# Altium PCB Chip_Socket_Programmer-X01.PcbDoc
Units mil, origin at the board's own origin, x right, y up, seen from the top; angles counter-clockwise.
Board outline 3000 x 2000 mil, 2 copper layers (Top Layer, Bottom Layer); 34 components, 20 nets, 125 pads, 53 vias.
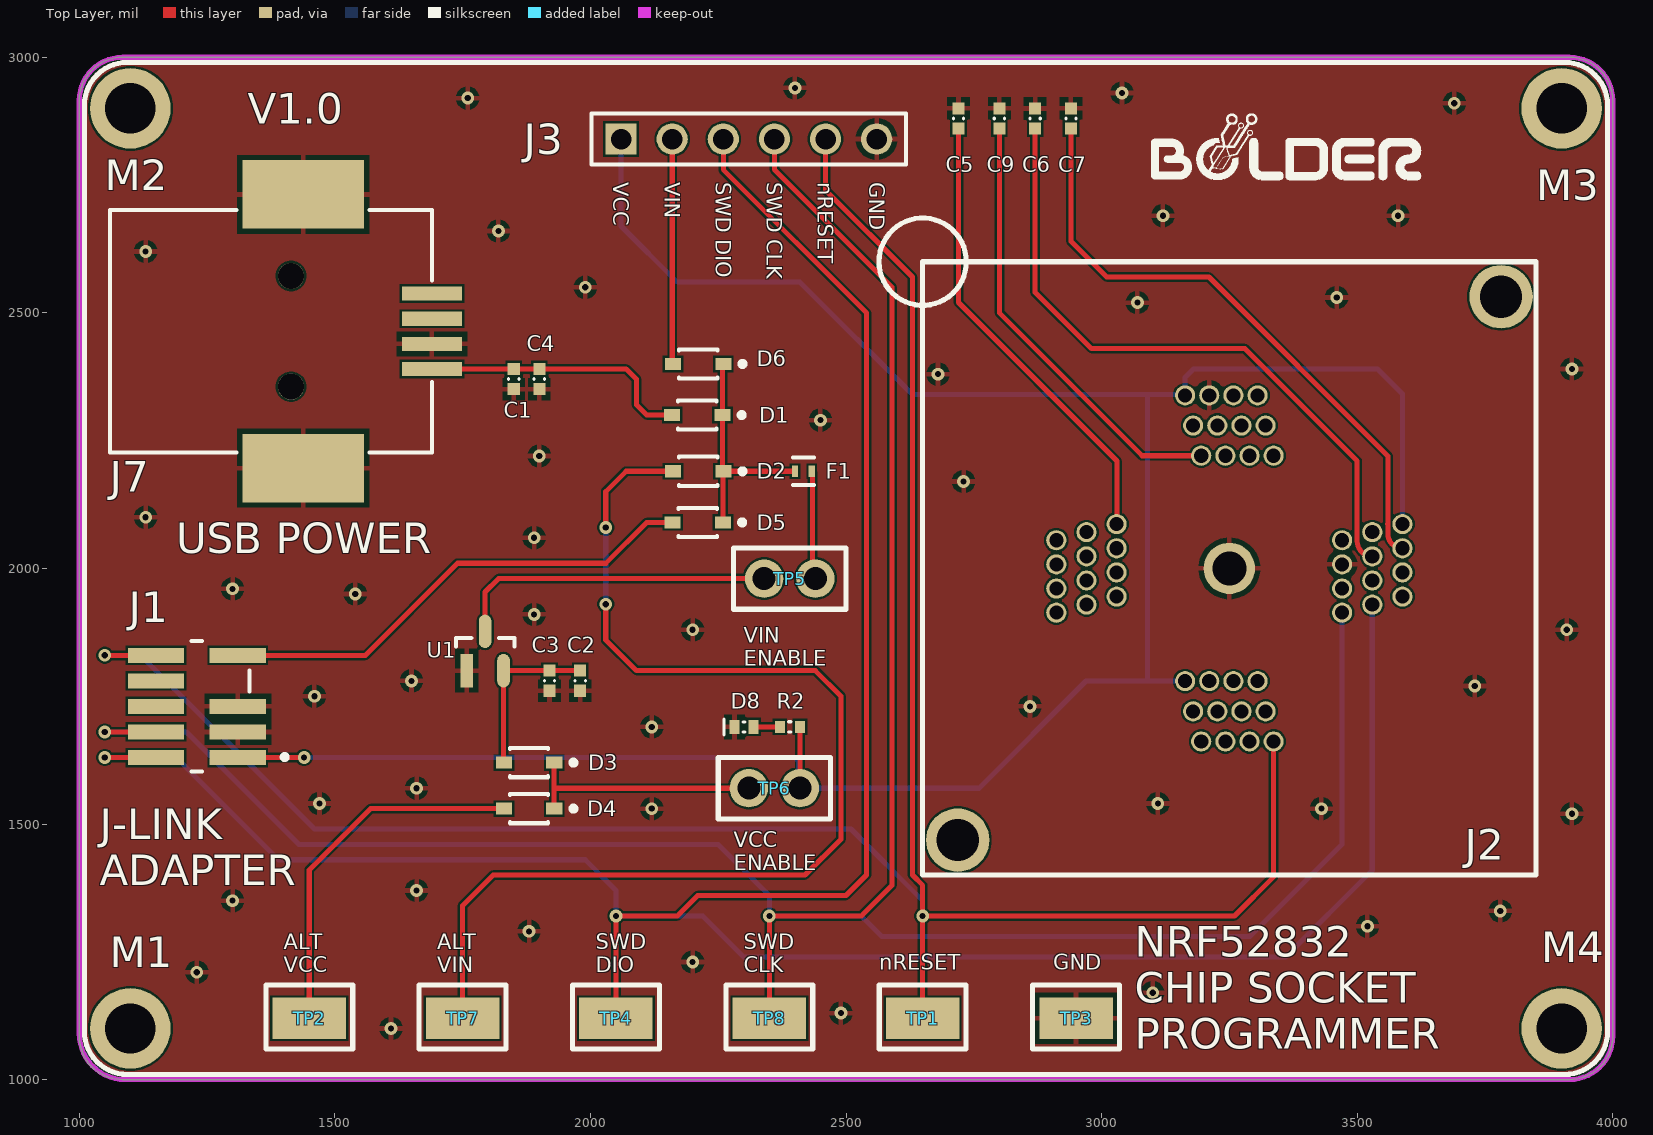
[diagram p0: Top Layer view]
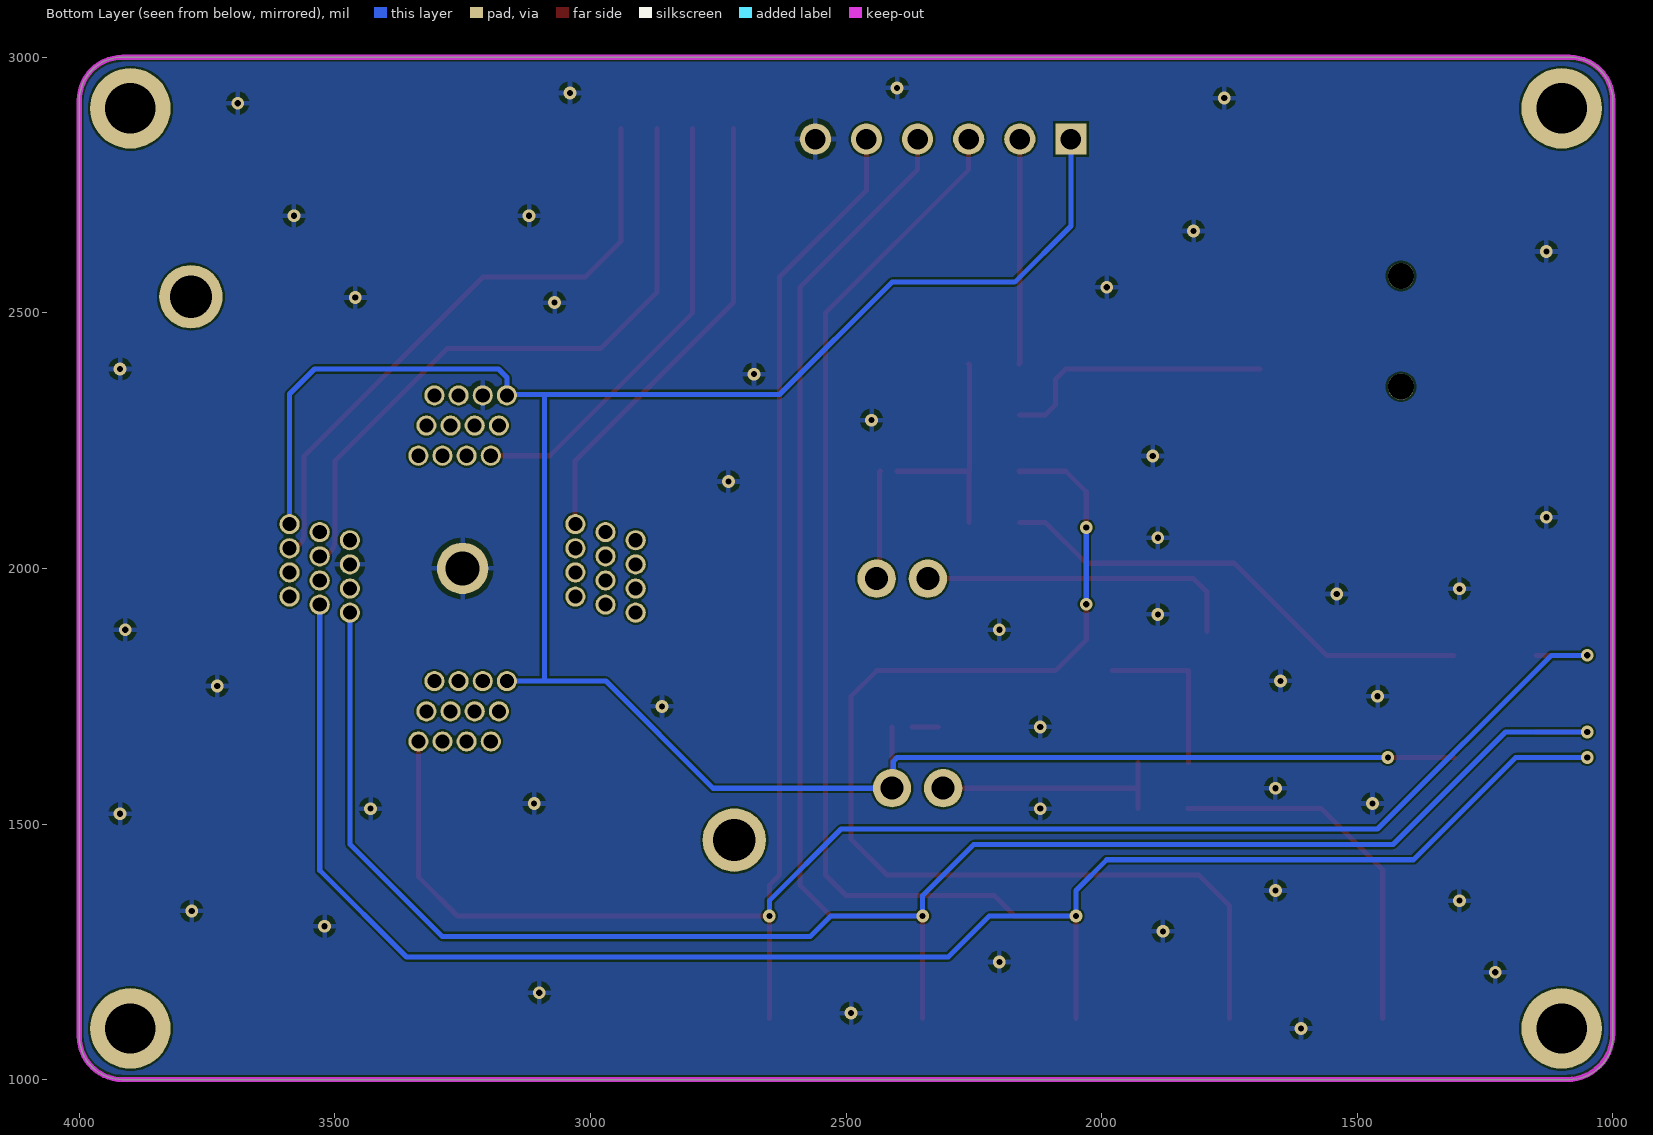
[diagram p1: Bottom Layer view, seen from below]
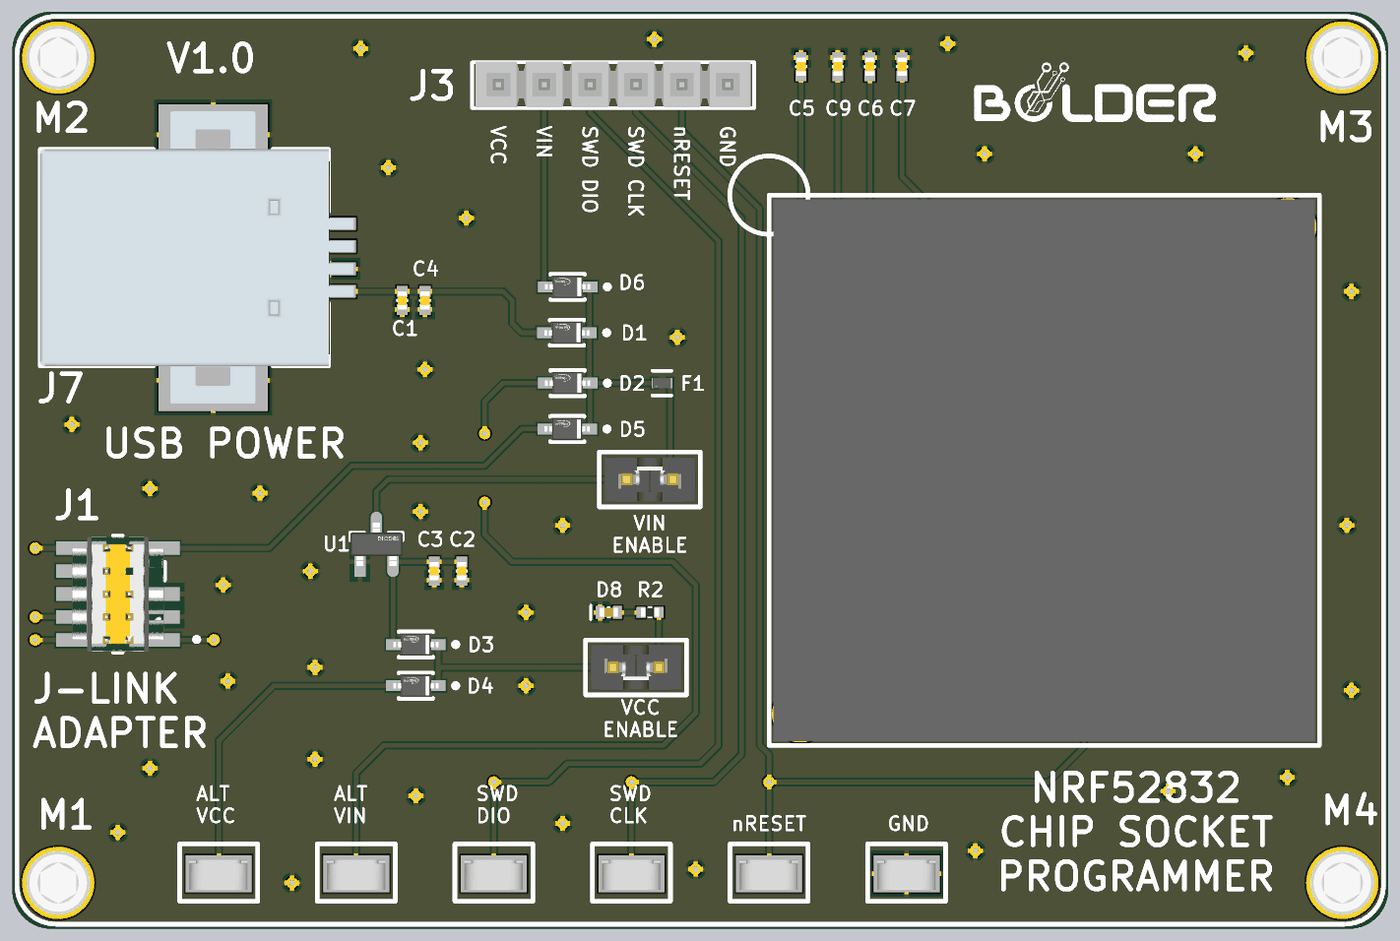
[diagram p2: 3D render of the assembled board from above, using the file's embedded part models]

## Layer stack, top to bottom
Top Solder: solder mask 0.4, Solder Resist, Dk 3.5
Top Layer: signal copper 1.4
Dielectric 1: dielectric 12.6, FR-4, Dk 4.8
Bottom Layer: signal copper 1.4
Bottom Solder: solder mask 0.4, Solder Resist, Dk 3.5

## Board outline
1000,1084.64 1000,2915.36 cw(c1084.64,2915.36) 1084.64,3000 3915.36,3000 cw(c3915.36,2915.36) 4000,2915.36 4000,1084.64 cw(c3915.36,1084.64) 3915.36,1000 1084.64,1000 cw(c1084.64,1084.64)

## Design rules (kind name [scope] priority, off if disabled: settings)
Clearance [All] p1: gap=4 ignorepadtopadclearanceinfootprint=FALSE
PolygonConnect [All] p1: connectstyle=Relief reliefconductorwidth=10 reliefentries=4 polygonreliefangle="90 Angle" airgapwidth=10
RoutingVias [All] p1: holewidth=28 width=50 viastyle="Through Hole" minholewidth=10 minwidth=25 maxholewidth=28 maxwidth=50
SolderMaskExpansion [All] p1: expansion=4 istentingtop=FALSE
Width [All] p1: maxlimit=40 minlimit=6 preferedwidth=10
30 further rules are at their usual default settings.

## Components (designator, comment, footprint, x,y, rotation, side; value= is the part's Value field where it differs from the comment)
C1 "1uF" C0402 1850,2370.32 r270 top
C2 "1uF" C0402 1980,1780.32 r270 top
C3 "10uF" C0402 1920,1780.32 r270 top
C4 "10uF" C0402 1900,2370.32 r270 top
C5 "100nF" C0402 2720,2880.32 r90 top
C6 "100pF" C0402 2870,2880 r90 top
C7 "100pF" C0402 2940,2880.32 r90 top
C9 "1uF" C0402 2800,2880.32 r270 top
D1 "BAS140WE6327HTSA1" FP-PG-SOD323-2-MFG 2209.21,2300 r180 top
D2 "BAS140WE6327HTSA1" FP-PG-SOD323-2-MFG 2210.79,2190 r180 top
D3 "BAS140WE6327HTSA1" FP-PG-SOD323-2-MFG 1880,1620 r180 top
D4 "BAS140WE6327HTSA1" FP-PG-SOD323-2-MFG 1880,1530 r180 top
D5 "BAS140WE6327HTSA1" FP-PG-SOD323-2-MFG 2210,2090 r180 top
D6 "BAS140WE6327HTSA1" FP-PG-SOD323-2-MFG 2210.79,2400 r180 top
D8 "Red" LED_0402 2300.63,1690 r180 top
F1 "F0402G0R05FNTR" FP-F0402G-MFG 2416.54,2190 r180 top value=3.4Ω
J1 "FTSH-105-01-L-DV-007-K" FTSH-105-01-L-DV-007-K 1310.24,1630 r0 top
J2 "248-4205-01" 248-4205-01 3250,2000 r0 top locked
J3 "TSW-106-07-T-S" SMTC-TSW-106-07-X-S 2060,2840 r0 top
J7 "62910416121" 62910416121 1375.04,2463.82 r270 top
M1 "M2/2-56 Mounting Hole" "MOUNTING HOLE" 1100,1100 r0 top
M2 "M2/2-56 Mounting Hole" "MOUNTING HOLE" 1100,2900 r0 top
M3 "M2/2-56 Mounting Hole" "MOUNTING HOLE" 3900,2900 r0 top
M4 "M2/2-56 Mounting Hole" "MOUNTING HOLE" 3900,1100 r0 top
R2 "422R" R0402 2390.32,1690 r180 top
TP1 "S1751-46R" S1751-46R 2650,1120 r0 top
TP2 "S1751-46R" S1751-46R 1450,1120 r0 top
TP3 "S1751-46R" S1751-46R 2950,1120 r0 top
TP4 "S1751-46R" S1751-46R 2050,1120 r0 top
TP5 "JUMPER" JUMPER 2340,1980 r0 top
TP6 "JUMPER" JUMPER 2410,1570 r180 top
TP7 "S1751-46R" S1751-46R 1750,1120 r0 top
TP8 "S1751-46R" S1751-46R 2350,1120 r0 top
U1 "AP7313-33SRG-7" FP-SOT23-IPC_A 1793.98,1838.45 r90 top

## Footprints (in the part's own frame and the unit in brackets; to place one, negate y for a bottom-side part, rotate by r counter-clockwise, add the part's x,y. Pads: shape width x height; smd on the part's side, far side on the other; paste and mask are expansions set on the pad)
248-4205-01 [mm] "3M Chip Socket, 48 Position QFN, 6x6 package, 0.4 mm Pitch"
  round 1 hole 0.7: 1(-5.6,2.2) 2(-7.1,1.8) 3(-8.6,1.4) 4(-5.6,1) 5(-7.1,0.6) 6(-8.6,0.2) 7(-5.6,-0.2) 8(-7.1,-0.6) 9(-8.6,-1) 10(-5.6,-1.4) 11(-7.1,-1.8) 12(-8.6,-2.2) 13(-2.2,-5.6) 14(-1.8,-7.1) 15(-1.4,-8.6) 16(-1,-5.6) 17(-0.6,-7.1) 18(-0.2,-8.6) 19(0.2,-5.6) 20(0.6,-7.1) 21(1,-8.6) 22(1.4,-5.6) 23(1.8,-7.1) 24(2.2,-8.6) 25(5.6,-2.2) 26(7.1,-1.8) 27(8.6,-1.4) 28(5.6,-1) 29(7.1,-0.6) 30(8.6,-0.2) 31(5.6,0.2) 32(7.1,0.6) 33(8.6,1) 34(5.6,1.4) 35(7.1,1.8) 36(8.6,2.2) 37(2.2,5.6) 38(1.8,7.1) 39(1.4,8.6) 40(1,5.6) 41(0.6,7.1) 42(0.2,8.6) 43(-0.2,5.6) 44(-0.6,7.1) 45(-1,8.6) 46(-1.4,5.6) 47(-1.8,7.1) 48(-2.2,8.6)
  round 2.55 hole 1.7: 49(0,0)
  round 3.15 hole 2.1: MH1(-13.5,-13.5) MH2(13.5,13.5)
  silkscreen extent -15.24,-15.24 15.24,15.24, body extent -15,-15 15,15, height 17.1
62910416121 [mm] "USB 2.0 Type B SMT Horizontal"
  rect 0.7x3 smd: 1(1.875,8) 2(-0.625,8) 3(-1.875,8) 4(0.625,8)
  round 1.3 hole 1.3 unplated: MH1(-2.75,1) MH2(2.75,1)
  rect 3.4x6.04 smd: Shell(-6.8,1.6) Shell(6.8,1.6)
  silkscreen extent -6.02,-8 6.02,8, body extent -8.1,-8 8.1,9.39, height 11.16
C0402 [mm]
  rect 0.6x0.6 smd: 1(-0.5,0) 2(0.5,0)
  silkscreen extent -0.02,-0.25 0.02,0.25, body extent -0.5,-0.25 0.5,0.25, height 0.55
FP-F0402G-MFG [mm]
  rect 0.31x0.55 smd paste+0 mask+0: 1(-0.42,0) 2(0.42,0)
  silkscreen extent -0.53,-0.68 0.53,0.68, body extent -0.67,-0.41 0.67,0.41, height 0.25
FP-PG-SOD323-2-MFG [mm]
  rect 0.8x0.6 smd paste+0 mask+0: 1(-1.25,0) 2(1.25,0)
  silkscreen extent -2.33,-0.72 0.95,0.72, body extent -1.75,-0.82 1.75,0.82, height 0.25
FP-SOT23-IPC_A [mm]
  rect 1.659x0.627 smd paste+0 mask+0: 1(-0.977,0.915)
  rrect100% 1.659x0.627 smd paste+0 mask+0: 2(-0.977,-0.915) 3(0.977,0)
  silkscreen extent 0.23,-1.45 0.65,1.45, body extent -2.31,-1.95 2.31,1.95, height 0.25
FTSH-105-01-L-DV-007-K [mm]
  rect 2.79x0.74 smd paste+0 mask+0: 1(0,0) 2(-4.07,0) 3(0,1.27) 4(-4.07,1.27) 5(0,2.54) 6(-4.07,2.54) 8(-4.07,3.81) 9(0,5.08) 10(-4.07,5.08)
  silkscreen extent -2.3,-0.7 2.46,5.78, body extent -5.57,-0.8 1.5,5.88, height 0.25
JUMPER [mil]
  round 75 hole 45: 1(0,0) 2(100,0)
  silkscreen extent -60,-60 160,60, body extent -50,-50 150,50, height 343
LED_0402 [mm] "0402 w/ LED mark"
  rect 0.5x0.7 smd: A(-0.475,0) K(0.475,0)
  silkscreen extent -0.04,-0.4 1,0.4, body extent -0.5,-0.25 0.5,0.25, height 0.35
"MOUNTING HOLE" [mm] "M2 or 2-56 Mounting Hole"
  round 4 hole 2.5: 11(0,0)
  body extent -1.78,-1.83 1.78,1.83, height 2.28
R0402 [mm]
  rect 0.5x0.6 smd: 1(-0.5,0) 2(0.5,0)
  silkscreen extent -0.06,-0.25 0.06,0.25, body extent -0.5,-0.25 0.5,0.25, height 0.35
S1751-46R [mm] "PC TEST POINT TIN SMD"
  rect 3.65x2.05 smd: 1(0,0)
  silkscreen extent -2.16,-1.52 2.16,1.65, body extent -1.63,-0.89 1.62,0.76, height 2
SMTC-TSW-106-07-X-S [mm] ".025 SQ Post Terminal Strip Assembly, 1x6 Pins, Vertical, 2.54mm Pitch, Male"
  rect 1.55x1.55 hole 1.02: 1(0,0)
  round 1.55 hole 1.02: 2(2.54,0) 3(5.08,0) 4(7.62,0) 5(10.16,0) 6(12.7,0)
  silkscreen extent -1.46,-1.27 14.16,1.27, body extent -1.27,-1.24 13.97,1.3, height 8.38

## Part data
C1 C2 C9: library part C-0402(1005), "Ceramic Capacitor, Multilayer, Ceramic, 6.3V, 20% +Tol, 20% -Tol, X5R, 15% TC, 1uF, Surface Mount, 0402", Case Code (Imperial)=0402, Case Code (Metric)=1005, Dielectric=X5R, Manufacturer=Yageo, Manufacturer Part Number=CC0402MRX5R5BB105, Max Operating Temperature=85°C, Min Operating Temperature=-55°C, Package Quantity=1, Supplier Part Number 1=311-1441-1-ND, Tolerance=20%, Voltage Rating=6.3V, Capacitance=1uF, Case/Package=0402, Category="Ceramic Capacitors", ComponentLink1Description=https://datasheet.ciiva.com/169/product-169683.pdf, ComponentLink1URL=https://datasheet.ciiva.com/169/product-169683.pdf, ComponentLink2Description=https://datasheet.ciiva.com:443/pdfs/VipMasterIC/IC/YAGO/YAGO-S-A0006851646/YAGO-S-A0006851646-1.pdf?src-supplier=IHS+Markit, ComponentLink2URL=https://datasheet.ciiva.com:443/pdfs/VipMasterIC/IC/YAGO/YAGO-S-A0006851646/YAGO-S-A0006851646-1.pdf?src-supplier=IHS+Markit, ComponentLink3Description=https://datasheet.ciiva.com/176/mlccorderingcode-176806.pdf?src-supplier=Digi-Key, ComponentLink3URL=https://datasheet.ciiva.com/176/mlccorderingcode-176806.pdf?src-supplier=Digi-Key, ComponentLink4Description=https://datasheet.ciiva.com/176/mlccorderingcode-176807.pdf?src-supplier=Digi-Key, ComponentLink4URL=https://datasheet.ciiva.com/176/mlccorderingcode-176807.pdf?src-supplier=Digi-Key, ComponentLink5Description=https://datasheet.ciiva.com/176/mlccorderingcode-176808.pdf?src-supplier=Digi-Key, ComponentLink5URL=https://datasheet.ciiva.com/176/mlccorderingcode-176808.pdf?src-supplier=Digi-Key, Composition=Ceramic, Depth=0.5mm, Dissipation Factor=10%, Halogen Free="Halogen Free", Height=0.5mm, Lead Free="Lead Free", Length=1mm, Mount="Surface Mount", Number of Pins=2, Packaging="Tape and Reel", Pricing 1="1=0.13000, 10=0.08900, 100=0.04200, 500=0.02946, 1000=0.02439, 2500=0.02270, 5000=0.02076 (USD)", RoHS=Yes, Stock 1=16697, Supplier 1=Digi-Key, Termination=SMD/SMT, Thickness=0.022inch, Voltage Rating (DC)=6.3V, Width=0.5mm
C3 C4: library part C-0402(1005), "Ceramic Capacitor, Multilayer, Ceramic, 10V, 20% +Tol, 20% -Tol, X5R, 15% TC, 10uF, Surface Mount, 0402", Capacitor Type=Ceramic, Manufacturer="Kyocera AVX", Manufacturer Part Number=0402ZD106MAT2A, Max Operating Temperature=85°C, Min Operating Temperature=-55°C, Negative Tolerance=20%, Package Shape=Rectangular, Rated DC Voltage (URdc)=10V, Supplier Part Number 1=478-10052-1-ND, Temperature Characteristics Code=X5R, Capacitance=10uF, Category="Ceramic Capacitors", ComponentLink1Description=https://datasheet.ciiva.com:443/pdfs/VipMasterIC/IC/AVXC/AVXC-S-A0009640604/AVXC-S-A0009640604-1.pdf?src-supplier=IHS+Markit, ComponentLink1URL=https://datasheet.ciiva.com:443/pdfs/VipMasterIC/IC/AVXC/AVXC-S-A0009640604/AVXC-S-A0009640604-1.pdf?src-supplier=IHS+Markit, ComponentLink2Description=http://catalogs.avx.com/SurfaceMount.pdf?src-supplier=Digi-Key, ComponentLink2URL=http://catalogs.avx.com/SurfaceMount.pdf?src-supplier=Digi-Key, ComponentLink3Description=http://datasheets.avx.com/cx5r.pdf?src-supplier=Digi-Key, ComponentLink3URL=http://datasheets.avx.com/cx5r.pdf?src-supplier=Digi-Key, ComponentLink4Description=https://www.farnell.com/datasheets/2260752.pdf?src-supplier=Newark, ComponentLink4URL=https://www.farnell.com/datasheets/2260752.pdf?src-supplier=Newark, Dielectric Material=Ceramic, JESD-609 Code=e3, Mount="Surface Mount", Multilayer=Yes, Number of Pins=2, Packaging="Tape and Reel", Positive Tolerance=20%, Pricing 1="1=0.54000, 10=0.37400, 50=0.26160, 100=0.22420, 500=0.16818, 1000=0.14202, 2500=0.13455, 5000=0.12708 (USD)", REACH SVHC=Yes, RoHS=Yes, RoHS Compliant=Yes, Size Code=0402, Stock 1=113474, Supplier 1=Digi-Key, Terminal Finish=Nickel, Termination=Wraparound
C5: library part C-0402(1005), "Ceramic Capacitor, Multilayer, Ceramic, 25V, 10% +Tol, 10% -Tol, X5R, 15% TC, 0.1uF, Surface Mount, 0402", Case Code (Imperial)=0402, Case Code (Metric)=1005, Dielectric=X5R, Manufacturer="Taiyo Yuden", Manufacturer Part Number=TMK105BJ104KV-F, Max Operating Temperature=85°C, Min Operating Temperature=-55°C, Package Quantity=1, Supplier Part Number 1=587-1456-1-ND, Tolerance=10%, Voltage=25V, Capacitance=100nF, Case/Package=0402, Category="Ceramic Capacitors", ComponentLink1Description=https://datasheet.ciiva.com/169/product-169683.pdf, ComponentLink1URL=https://datasheet.ciiva.com/169/product-169683.pdf, ComponentLink2Description=https://datasheet.ciiva.com:443/pdfs/VipMasterIC/IC/TAIY/TAIY-S-A0009103435/TAIY-S-A0009103038-1.pdf?src-supplier=IHS+Markit, ComponentLink2URL=https://datasheet.ciiva.com:443/pdfs/VipMasterIC/IC/TAIY/TAIY-S-A0009103435/TAIY-S-A0009103038-1.pdf?src-supplier=IHS+Markit, ComponentLink3Description=https://datasheet.ciiva.com/30051/25tmk105bj104kv-f-30051094.pdf?src-supplier=Onlinecomponents.com, ComponentLink3URL=https://datasheet.ciiva.com/30051/25tmk105bj104kv-f-30051094.pdf?src-supplier=Onlinecomponents.com, ComponentLink4Description=https://datasheet.ciiva.com/15922/28tmk105bj104kv-f-15922315.pdf?src-supplier=Onlinecomponents.com, ComponentLink4URL=https://datasheet.ciiva.com/15922/28tmk105bj104kv-f-15922315.pdf?src-supplier=Onlinecomponents.com, ComponentLink5Description=https://datasheet.ciiva.com/131/tmk105bj104kv-f-ss-131420.pdf?src-supplier=Digi-Key, ComponentLink5URL=https://datasheet.ciiva.com/131/tmk105bj104kv-f-ss-131420.pdf?src-supplier=Digi-Key, ComponentLink6Description=https://datasheet.ciiva.com/22768/1693457-22768649.pdf?src-supplier=Farnell, ComponentLink6URL=https://datasheet.ciiva.com/22768/1693457-22768649.pdf?src-supplier=Farnell, Composition=Ceramic, Depth=0.5mm, Halogen Free="Halogen Free", Height=0.5mm, Lead Free="Lead Free", Length=1mm, Mount="Surface Mount", Number of Pins=2, Packaging="Tape and Reel", Pricing 1="1=0.10000, 10=0.04600, 100=0.02050, 500=0.01464, 1000=0.01150, 2500=0.01045, 5000=0.00961 (USD)", REACH SVHC="No SVHC", RoHS=Yes, Stock 1=27456801, Supplier 1=Digi-Key, Termination=SMD/SMT, Thickness=0.022inch, Voltage Rating=25V, Voltage Rating (DC)=25V, Weight=2.3E-05oz, Width=0.5mm
C6 C7: library part C-0402(1005), "Ceramic Capacitor, Multilayer, Ceramic, 50V, 1% +Tol, 1% -Tol, C0G, 30ppm/Cel TC, 0.0001uF, Surface Mount, 0402", Case Code (Imperial)=0402, Case Code (Metric)=1005, Dielectric=C0G, Manufacturer=Yageo, Manufacturer Part Number=CC0402FRNPO9BN101, Max Operating Temperature=125°C, Min Operating Temperature=-55°C, Package Quantity=10000, Supplier Part Number 1=311-3329-1-ND, Tolerance=1%, Voltage Rating=50V, Capacitance=100pF, Case/Package=0402, Category="Ceramic Capacitors", ComponentLink1Description=https://datasheet.ciiva.com/169/product-169683.pdf, ComponentLink1URL=https://datasheet.ciiva.com/169/product-169683.pdf, ComponentLink2Description=https://datasheet.ciiva.com:443/pdfs/VipMasterIC/IC/YAGO/YAGO-S-A0009251638/YAGO-S-A0009251638-1.pdf?src-supplier=IHS+Markit, ComponentLink2URL=https://datasheet.ciiva.com:443/pdfs/VipMasterIC/IC/YAGO/YAGO-S-A0009251638/YAGO-S-A0009251638-1.pdf?src-supplier=IHS+Markit, ComponentLink3Description=http://www.mouser.com/ds/2/447/Yageo_UPY-GP_NP0_16V-to-50V_9-358835.pdf?src-supplier=Mouser, ComponentLink3URL=http://www.mouser.com/ds/2/447/Yageo_UPY-GP_NP0_16V-to-50V_9-358835.pdf?src-supplier=Mouser, ComponentLink4Description=http://components.arrow.com/part/dataview/0323_00775990?src-supplier=Arrow+Europe, ComponentLink4URL=http://components.arrow.com/part/dataview/0323_00775990?src-supplier=Arrow+Europe, ComponentLink5Description=http://www.yageo.com/NewPortal/yageodocoutput?fileName=/pdf/MLCC/UPY-GP_NP0_16V-to-50V_14.pdf&src-supplier=Digi-Key, ComponentLink5URL=http://www.yageo.com/NewPortal/yageodocoutput?fileName=/pdf/MLCC/UPY-GP_NP0_16V-to-50V_14.pdf&src-supplier=Digi-Key, ComponentLink6Description=http://www.yageo.com/documents/recent/UPY-GP_NP0_16V-to-50V_16.pdf?src-supplier=Digi-Key, ComponentLink6URL=http://www.yageo.com/documents/recent/UPY-GP_NP0_16V-to-50V_16.pdf?src-supplier=Digi-Key, ComponentLink7Description=http://www.yageo.com/documents/recent/UPY-GP_NP0_16V-to-50V_9.pdf?src-supplier=Future+Electronics, ComponentLink7URL=http://www.yageo.com/documents/recent/UPY-GP_NP0_16V-to-50V_9.pdf?src-supplier=Future+Electronics, Composition=Ceramic, Depth=0.5mm, Lead Free="Lead Free", Length=1mm, Mount="Surface Mount", Packaging="Tape and Reel", Pricing 1="1=0.11000, 10=0.08200, 100=0.03840, 500=0.02690, 1000=0.02228, 2500=0.02073, 5000=0.01897 (USD)", RoHS=Yes, Stock 1=22812, Supplier 1=Digi-Key, Termination=SMD/SMT, Thickness=0.022inch, Voltage Rating (DC)=50V, Width=0.02inch
D1 D2 D3 D4 D5 D6: library part CMP-32890-000002-1, "DIODE SCHOTTKY 40V 120MA SOD323", Average Rectified Current=120mA, Case/Package=SOD-323-2, Forward Voltage=1V, Manufacturer=Infineon, Max Operating Temperature=125°C, Max Power Dissipation=250mW, Max Repetitive Reverse Voltage (Vrrm)=40V, Min Operating Temperature=-55°C, Package Body Material=Plastic, Package Shape=Rectangular, Package Style="SMALL OUTLINEMeter", Peak Non-Repetitive Surge Current=200mA, Supplier Part Number 1=BAS140WE6327HTSA1CT-ND, Category="Rectifier Diodes", ComponentLink1Description=https://datasheet.ciiva.com:443/pdfs/VipMasterIC/IC/INFN/INFNS11688/INFNS11688-1.pdf?src-supplier=IHS+Markit, ComponentLink1URL=https://datasheet.ciiva.com:443/pdfs/VipMasterIC/IC/INFN/INFNS11688/INFNS11688-1.pdf?src-supplier=IHS+Markit, ComponentLink2Description=https://datasheet.ciiva.com/26851/getdatasheetpartid-730941-26851022.pdf?src-supplier=Verical, ComponentLink2URL=https://datasheet.ciiva.com/26851/getdatasheetpartid-730941-26851022.pdf?src-supplier=Verical, ComponentLink3Description=https://datasheet.ciiva.com/8303/infineon-bas40-bas140series-ds-v01-01-en-8303321.pdf?src-supplier=Avnet, ComponentLink3URL=https://datasheet.ciiva.com/8303/infineon-bas40-bas140series-ds-v01-01-en-8303321.pdf?src-supplier=Avnet, Diode Element Material=SILICON, Diode Type=RECTIFIER, Element Configuration=Single, Forward Current=120mA, Halogen Free="Not Halogen Free", JESD-30 Code=R-PDSO-G2, JESD-609 Code=e3, Lead Free="Lead Free", Manufacturer Part Number=BAS140WE6327HTSA1, Max Output Current=120mA, Max Reverse Voltage (DC)=40V, Moisture Sensitivity Level=1, Mount="Surface Mount", Number of Elements=1, Number of Pins=2, Packaging="Tape and Reel", Pricing 1="1=0.55000, 10=0.41300, 100=0.25740, 500=0.17612, 1000=0.13547 (USD)", Qualification Status="Not Qualified", Radiation Hardening=No, REACH SVHC=Yes, Reverse Recovery Time=100ps, RoHS=Yes, RoHS Compliant=Yes, Stock 1=1828, Supplier 1=Digi-Key, Surface Mount=Yes, Technology=SCHOTTKY, Terminal Finish=Tin, Terminal Form="Gull Wing", Terminal Position=DUAL
D8: library part LED_0402(1005), "Single Color LED, Hyper Red, Water Clear, 0.8mm", Case Code (Imperial)=0402, Case Code (Metric)=1005, Forward Current=20mA, Forward Voltage=1.95V, Lens Color=Clear, Manufacturer=Kingbright, Manufacturer Part Number=APHHS1005SURCK, Max Operating Temperature=85°C, Min Operating Temperature=-40°C, Package Quantity=2000, Supplier Part Number 1=754-1104-1-ND, Case/Package=0402, Category=LEDs, Color=Red, ComponentLink1Description=https://datasheet.ciiva.com:443/pdfs/VipMasterIC/IC/KBEC/KBEC-S-A0008947180/KBEC-S-A0008958151-1.pdf?src-supplier=IHS+Markit, ComponentLink1URL=https://datasheet.ciiva.com:443/pdfs/VipMasterIC/IC/KBEC/KBEC-S-A0008947180/KBEC-S-A0008958151-1.pdf?src-supplier=IHS+Markit, ComponentLink2Description=https://datasheet.ciiva.com/4689/aphhs1005surck-32322-4689068.pdf?src-supplier=Mouser, ComponentLink2URL=https://datasheet.ciiva.com/4689/aphhs1005surck-32322-4689068.pdf?src-supplier=Mouser, ComponentLink3Description=https://datasheet.ciiva.com/2114/aphhs1005surck-2114140.pdf?src-supplier=Digi-Key, ComponentLink3URL=https://datasheet.ciiva.com/2114/aphhs1005surck-2114140.pdf?src-supplier=Digi-Key, ComponentLink4Description=https://datasheet.ciiva.com/14603/70062833-14603899.pdf?src-supplier=Allied+Electronics, ComponentLink4URL=https://datasheet.ciiva.com/14603/70062833-14603899.pdf?src-supplier=Allied+Electronics, ComponentLink5Description=https://datasheet.ciiva.com/2114/aphhs1005surck-2114142.pdf?src-supplier=Digi-Key, ComponentLink5URL=https://datasheet.ciiva.com/2114/aphhs1005surck-2114142.pdf?src-supplier=Digi-Key, ComponentLink6Description=https://datasheet.ciiva.com/2114/aphhs1005surck-2114141.pdf?src-supplier=Digi-Key, ComponentLink6URL=https://datasheet.ciiva.com/2114/aphhs1005surck-2114141.pdf?src-supplier=Digi-Key, Dominant Wavelength=630nm, Height=0.6mm, Illumination Color=Red, Lead Free="Lead Free", Length=1mm, Lens Style=Clear,Flat, Luminous Intensity=220mcd, Mount="Surface Mount", Number of LEDs=1, Number of Pins=2, Packaging="Tape and Reel", Pricing 1="1=0.50000, 10=0.35400, 100=0.20650, 500=0.14160, 1000=0.11800 (USD)", RoHS=Yes, Stock 1=12156, Supplier 1=Digi-Key, Test Current=20mA, Viewing Angle=120°, Wavelength=635nm, Width=0.5mm
F1: library part CMP-04585-000002-1, "FUSE BOARD MOUNT 50MA 32VDC 0402", Current Rating=50mA, Fuse Voltage Drop=250mV, Manufacturer="AVX Corporation", Max Operating Temperature=125°C, Min Operating Temperature=-55°C, Package=F0402G, Resistance=3.4Ω, Supplier Part Number 1=478-6482-1-ND, Temperature="-55°C to +125°C", Temperature Range High=+125°C, Voltage Rating=32V, Automotive=No, Category=Fuse, Circuit Protection Type="Electric Fuse", ComponentLink1Description=https://datasheet.ciiva.com:443/pdfs/VipMasterIC/IC/AVXC/AVXCS07889/AVXCS07889-1.pdf?src-supplier=IHS+Markit, ComponentLink1URL=https://datasheet.ciiva.com:443/pdfs/VipMasterIC/IC/AVXC/AVXCS07889/AVXCS07889-1.pdf?src-supplier=IHS+Markit, ComponentLink2Description=Datasheet, ComponentLink2URL=http://datasheets.avx.com/AccuGuardLC_0402.pdf, ComponentLink3Description=https://datasheet.ciiva.com/4485/accug2minilc-38833-4485751.pdf?src-supplier=Mouser, ComponentLink3URL=https://datasheet.ciiva.com/4485/accug2minilc-38833-4485751.pdf?src-supplier=Mouser, ComponentLink4Description=https://datasheet.ciiva.com/301/accug2minilc-301366.pdf?src-supplier=Digi-Key, ComponentLink4URL=https://datasheet.ciiva.com/301/accug2minilc-301366.pdf?src-supplier=Digi-Key, ComponentLink5Description=https://datasheet.ciiva.com/301/accug2minilc-301367.pdf?src-supplier=Digi-Key, ComponentLink5URL=https://datasheet.ciiva.com/301/accug2minilc-301367.pdf?src-supplier=Digi-Key, ComponentLink6Description=https://datasheet.ciiva.com/301/accug2minilc-301368.pdf?src-supplier=Digi-Key, ComponentLink6URL=https://datasheet.ciiva.com/301/accug2minilc-301368.pdf?src-supplier=Digi-Key, ComponentLink7Description=https://datasheet.ciiva.com/17417/accug2minilc-17417929.pdf?src-supplier=Avnet+Europe, ComponentLink7URL=https://datasheet.ciiva.com/17417/accug2minilc-17417929.pdf?src-supplier=Avnet+Europe, ComponentLink8Description=https://datasheet.ciiva.com/3017/accug2minilc-3017725.pdf?src-supplier=Avnet, ComponentLink8URL=https://datasheet.ciiva.com/3017/accug2minilc-3017725.pdf?src-supplier=Avnet, Device Class L1="Circuit Protection", Device Class L2=Fuses, Device Class L3=unset, Digikey Description="FUSE BOARD MOUNT 50MA 32VDC 0402", Fuse Blow Speed=Fast, Fuse Current=50mA, Height=0.4mm, JESD-609 Code=e3, Joule-integral-Nom=0J, Lead Free=Yes, Manufacturer Part Number=F0402G0R05FNTR, Mount="Surface Mount", Mouser Description="Surface Mount Fuses 0402 50mA fuse", Octopart=https://octopart.com/f0402g0r05fntr-avx-19631750, Pricing 1="1=0.80000, 5=0.78000, 10=0.75600, 50=0.63600, 100=0.52800, 250=0.48000, 500=0.40800, 1000=0.36000 (USD)", REACH SVHC=Yes, RoHS=TRUE, RoHS Compliant=Yes, Stock 1=222662, Supplier 1=Digi-Key, Temperature Range Low=-55°C, Terminal Finish=Nickel, Voltage Rating (AC)=32V, Voltage Rating (DC)=32V
J1: library part 7c368be3265735b2816d0cab4417f87, "CONN HEADER SMD 10POS 1.27MM", Current Rating=3.4A, Flammability Rating="UL94 V-0", Insulation Color=Black, Manufacturer=Samtec, Max Operating Temperature=125°C, Min Operating Temperature=-55°C, Supplier Part Number 1=SAM9438-ND, Category="Headers and Wire Housings", ComponentLink1Description=https://datasheet.ciiva.com:443/pdfs/VipMasterIC/IC/SAMI/SAMI-S-A0006911451/SAMI-S-A0006911451-1.pdf?src-supplier=IHS+Markit, ComponentLink1URL=https://datasheet.ciiva.com:443/pdfs/VipMasterIC/IC/SAMI/SAMI-S-A0006911451/SAMI-S-A0006911451-1.pdf?src-supplier=IHS+Markit, ComponentLink2Description=http://www.farnell.com/datasheets/2570365.pdf?src-supplier=Farnell, ComponentLink2URL=http://www.farnell.com/datasheets/2570365.pdf?src-supplier=Farnell, ComponentLink3Description=http://suddendocs.samtec.com/prints/ftsh-1xx-xx-xxx-dv-xxx-xxx-mkt.pdf?src-supplier=Digi-Key, ComponentLink3URL=http://suddendocs.samtec.com/prints/ftsh-1xx-xx-xxx-dv-xxx-xxx-mkt.pdf?src-supplier=Digi-Key, ComponentLink4Description=http://www.farnell.com/datasheets/2570365.pdf?src-supplier=Element14, ComponentLink4URL=http://www.farnell.com/datasheets/2570365.pdf?src-supplier=Element14, ComponentLink5Description=http://www.farnell.com/datasheets/2570365.pdf?src-supplier=Newark, ComponentLink5URL=http://www.farnell.com/datasheets/2570365.pdf?src-supplier=Newark, Connector Type="Male Pin", Contact Material=Bronze, Contact Plating=Gold, Contact Shape=Square, Fastening Type=Push,Pull, Insulation Material=Polymer, Manufacturer Part Number=FTSH-105-01-L-DV-007-K, Mount="Surface Mount", Number of Pins=10, Number of Positions=10, Number of Positions Loaded=9, Number of Rows=2, Packaging=Rail/Tube, Pricing 1="1=3.43000, 10=3.28800, 100=2.74000, 500=2.32900, 1000=1.98650, 5000=1.78100 (USD)", RoHS=No, Supplier 1=Digi-Key, Termination=Solder
J2: "IC Socket", Manufacturer=3M, Supplier Part Number 1=3M10836-ND, Category="IC and Component Sockets", ComponentLink1Description=https://datasheet.ciiva.com:443/pdfs/VipMasterIC/IC/IIIM/IIIMS02795/IIIMS02795-1.pdf?src-supplier=IHS+Markit, ComponentLink1URL=https://datasheet.ciiva.com:443/pdfs/VipMasterIC/IC/IIIM/IIIMS02795/IIIMS02795-1.pdf?src-supplier=IHS+Markit, ComponentLink2Description=https://datasheet.ciiva.com/6783/cd2451-6783172.pdf?src-supplier=Digi-Key, ComponentLink2URL=https://datasheet.ciiva.com/6783/cd2451-6783172.pdf?src-supplier=Digi-Key, ComponentLink3Description=https://datasheet.ciiva.com/12084/cd2451-52150-12084009.pdf?src-supplier=Mouser, ComponentLink3URL=https://datasheet.ciiva.com/12084/cd2451-52150-12084009.pdf?src-supplier=Mouser, ComponentLink4Description=https://datasheet.ciiva.com/1102/cd2451-1102403.pdf?src-supplier=Newark, ComponentLink4URL=https://datasheet.ciiva.com/1102/cd2451-1102403.pdf?src-supplier=Newark, ComponentLink5Description=https://datasheet.ciiva.com/8006/cd2451-8006713.pdf?src-supplier=Element14, ComponentLink5URL=https://datasheet.ciiva.com/8006/cd2451-8006713.pdf?src-supplier=Element14, Contact Finish - Mating="NOT SPECIFIED", Device Socket Type="IC SOCKET", Manufacturer Part Number=248-4205-01, Pricing 1="1=116.49000, 10=109.64200, 25=106.21520, 50=99.36260, 100=93.88060 (USD)", REACH SVHC="No SVHC", RoHS=Yes, RoHS Compliant=Yes, Stock 1=14, Supplier 1=Digi-Key
J3: library part CMP-1024-00384-1, "0.025\" SQ Post Header, Through-hole, Vertical, -55 to 105 degC, 2.54 mm Pitch, 6-Pin, Male, RoHS", Manufacturer=Samtec, Temperature Range="-55 to 105 degC", ComponentLink1Description="Manufacturer URL", ComponentLink1URL=http://www.samtec.com, ComponentLink2Description=Datasheet, ComponentLink2URL=http://www.samtec.com/documents/webfiles/pdf/TSW_TH.PDF, ComponentLink3Description="Package Specification", ComponentLink3URL=http://www.samtec.com/documents/webfiles/cpdf/TSW-XXX-XX-XXX-X-XX-XXX-MKT.pdf, DatasheetVersion=F-214, Mounting Technology=Through-hole, Orientation=Vertical, PackageDescription=".025[0.64] SQ. Post Terminal Strip Assembly", PackageReference=TSW-106-07-X-S, PackageVersion="DM, 8/1988", PartNumber=TSW-106-07-T-S, Pitch="2.54 mm", RoHS=True
J7: library part CMP-1502-03244-1, "USB 2.0 Type B Receptacle WR-COM, Horizontal, SMT, with Pads and Pegs", Current Rating=1.5A, Flammability Rating="UL94 V-0", Insulation Color=Black, Manufacturer="Wurth Electronics", Max Operating Temperature=105°C, Min Operating Temperature=-40°C, Package Quantity=150, Supplier Part Number 1=732-3152-1-ND, Category=Connectors, ComponentLink1Description=https://datasheet.ciiva.com:443/pdfs/VipMasterIC/IC/MIDC/MIDC-S-A0004022663/MIDC-S-A0003061583-1.pdf?src-supplier=IHS+Markit, ComponentLink1URL=https://datasheet.ciiva.com:443/pdfs/VipMasterIC/IC/MIDC/MIDC-S-A0004022663/MIDC-S-A0003061583-1.pdf?src-supplier=IHS+Markit, ComponentLink2Description=https://datasheet.ciiva.com/851/62910416121-851244.pdf?src-supplier=Digi-Key, ComponentLink2URL=https://datasheet.ciiva.com/851/62910416121-851244.pdf?src-supplier=Digi-Key, ComponentLink3Description=https://datasheet.ciiva.com/851/62910416121-851245.pdf?src-supplier=Digi-Key, ComponentLink3URL=https://datasheet.ciiva.com/851/62910416121-851245.pdf?src-supplier=Digi-Key, ComponentLink4Description=https://datasheet.ciiva.com/851/62910416121-851246.pdf?src-supplier=Digi-Key, ComponentLink4URL=https://datasheet.ciiva.com/851/62910416121-851246.pdf?src-supplier=Digi-Key, Connector Type=USB, Contact Material="Copper Alloy", Contact Plating=Gold, Features=Shielded, Gender=Receptacle, Lead Free="Lead Free", Length=16mm, Manufacturer Part Number=62910416121, Mating Cycles=1500, Mount="Surface Mount", Number of Contacts=4, Number of Ports=1, Orientation="Right Angle", Packaging="Tape and Reel", Pricing 1="1=3.83000, 10=3.76300, 50=3.49400, 100=3.22600 (USD)", REACH SVHC=Unknown, RoHS=Yes, Shielding=Shielded, Stock 1=80, Supplier 1=Digi-Key, Termination=Solder, USB Standard="USB 2.0"
R2: library part R-0402(1005), "Fixed Resistor, Thin Film, 0.0625W, 422ohm, 50V, 0.1% +/-Tol, 25ppm/Cel, Surface Mount, 0402", Case Code (Imperial)=0402, Case Code (Metric)=1005, Manufacturer=Yageo, Manufacturer Part Number=RT0402BRD07422RL, Max Operating Temperature=125°C, Min Operating Temperature=-55°C, Power Rating=62.5mW, Supplier Part Number 1=YAG4263CT-ND, Temperature Coefficient=25ppm/°C, Tolerance=0.1%, Voltage Rating=50V, Case/Package=0402, Category="Chip SMD Resistors", ComponentLink1Description=https://datasheet.ciiva.com:443/pdfs/VipMasterIC/IC/YAGO/YAGO-S-A0008510989/YAGO-S-A0008510989-1.pdf?src-supplier=IHS+Markit, ComponentLink1URL=https://datasheet.ciiva.com:443/pdfs/VipMasterIC/IC/YAGO/YAGO-S-A0008510989/YAGO-S-A0008510989-1.pdf?src-supplier=IHS+Markit, ComponentLink2Description=https://datasheet.ciiva.com/12705/pyu-rt-1-to-0-05-rohs-l-4-12705867.pdf?src-supplier=Mouser, ComponentLink2URL=https://datasheet.ciiva.com/12705/pyu-rt-1-to-0-05-rohs-l-4-12705867.pdf?src-supplier=Mouser, Height=350um, Lead Free="Lead Free", Length=1mm, Packaging="Tape and Reel", Pricing 1="1=0.39000, 10=0.27800, 100=0.11140, 1000=0.05488, 2500=0.05084, 5000=0.04600 (USD)", Resistance=422R, RoHS=Yes, Stock 1=9302, Supplier 1=Digi-Key, Termination=SMD/SMT, Voltage Rating (DC)=50V, Width=500um
TP1 TP2 TP3 TP4 TP7 TP8: "PC TEST POINT TIN SMD", Color=Natural, Manufacturer="Harwin Inc.", Supplier Part Number 1=952-1478-1-ND, Category="Test and Measurement", ComponentLink1Description=http://cdn.harwin.com/pdfs/S1751.pdf, ComponentLink1URL=http://cdn.harwin.com/pdfs/S1751.pdf, Manufacturer Part Number=S1751-46R, Material="Copper Alloy", Mounting Type="Surface Mount", Packaging="Cut Tape (CT)", Pricing 1="1=0.29, 10=0.272, 25=0.2324, 50=0.2032, 100=0.1888, 250=0.167, 500=0.15972, 1000=0.13068 (USD)", RoHS="RoHS Compliant", Stock 1=275112, Supplier 1=Digi-Key, Terminal="0.128\" x 0.065\" x 0.079\" (3.25mm x 1.65mm x 2.00mm) Brass, Tin Plated", Type="PC Test Point"
TP5 TP6: "SHUNT LP W/HANDLE 2 POS 30AU", Color=Black, Contact Current Rating=3A, Contact Resistance=15mR, Flammability Rating="UL94 V-0", Manufacturer="TE Connectivity", Manufacturer Part Number=8815452, Max Operating Temperature=105°C, Min Operating Temperature=-65°C, Package Quantity=14000, Supplier Part Number 1=A26242-ND, Approvals=UL,CSA, Category="Headers and Wire Housings", ComponentLink1Description=https://datasheet.ciiva.com/1455/92946-1455888.pdf?src-supplier=Newark, ComponentLink1URL=https://datasheet.ciiva.com/1455/92946-1455888.pdf?src-supplier=Newark, ComponentLink2Description=https://datasheet.ciiva.com/19459/841467-19459897.pdf?src-supplier=Jameco, ComponentLink2URL=https://datasheet.ciiva.com/19459/841467-19459897.pdf?src-supplier=Jameco, ComponentLink3Description=https://datasheet.ciiva.com/15174/getdatasheetpartid-155768-15174939.pdf?src-supplier=Verical, ComponentLink3URL=https://datasheet.ciiva.com/15174/getdatasheetpartid-155768-15174939.pdf?src-supplier=Verical, ComponentLink4Description=https://datasheet.ciiva.com/11754/0900766b80da19e8-11754990.pdf?src-supplier=RSComponents, ComponentLink4URL=https://datasheet.ciiva.com/11754/0900766b80da19e8-11754990.pdf?src-supplier=RSComponents, ComponentLink5Description=https://datasheet.ciiva.com/30154/eng-cs-1307819-section-6-7and8-0808-30154293.pdf?src-supplier=Onlinecomponents.com, ComponentLink5URL=https://datasheet.ciiva.com/30154/eng-cs-1307819-section-6-7and8-0808-30154293.pdf?src-supplier=Onlinecomponents.com, ComponentLink6Description=https://datasheet.ciiva.com/767/eng-cd-881545-k3-767850.pdf?src-supplier=Digi-Key, ComponentLink6URL=https://datasheet.ciiva.com/767/eng-cd-881545-k3-767850.pdf?src-supplier=Digi-Key, ComponentLink7Description=https://datasheet.ciiva.com/3120/eng-cs-1307819-section-6-7and8-0808-3120202.pdf?src-supplier=Avnet, ComponentLink7URL=https://datasheet.ciiva.com/3120/eng-cs-1307819-section-6-7and8-0808-3120202.pdf?src-supplier=Avnet, Contact Gender=Female, Contact Material=Bronze, Contact Plating=Gold, Current Rating=3A, Depth=10.9mm, Gender=Female, Height=10.9mm, Housing Color=Black, Housing Material=Thermoplastic, Length=5.08mm, Number of Contacts=2, Number of Positions=2, Number of Rows=1, Orientation=Straight, Packaging=Bag, Pitch=2.54mm, Pricing 1="1=0.280000, 10=0.262000, 25=0.223600, 50=0.195600, 100=0.181700, 250=0.160760, 500=0.153760, 1000=0.125800, 2500=0.115320 (USD)", Radiation Hardening=No, REACH SVHC="No SVHC", RoHS=Yes, Stock 1=2099, Supplier 1=Digi-Key, Termination=Solder, Width=2.5mm
U1: library part CMP-12756-000034-1, "IC REG LIN 3.3V 150MA SOT23R-3", Case/Package=TO-236-3, Dropout Voltage=150mV, Dropout Voltage1-Max=300mV, Manufacturer=Diodes, Max Input Voltage=6V, Max Operating Temperature=85°C, Max Output Current=150mA, Max Power Dissipation=600mW, Min Current Limit=200mA, Min Input Voltage=2V, Min Operating Temperature=-40°C, Min Output Voltage=3.3V, Operating Temperature, TJ-Max=125°C, Output Voltage1-Max=3.366V, Output Voltage1-Min=3.234V, Package Body Material=Plastic, Package Code=LSSOP, Package Quantity=3000, Package Shape=Rectangular, Package Style="SMALL OUTLINE, LOW PROFILE, SHRINK PITCHMeter", Peak Reflow Temperature (Cel)=260°C, Power Dissipation=540W, Quiescent Current=75uA, Supplier Part Number 1=AP7313-33SRG-7DICT-ND, Time @ Peak Reflow Temperature-Max (s)=30s, Accuracy=2%, Category="Voltage Regulators - Linear", ComponentLink1Description=https://datasheet.ciiva.com:443/pdfs/VipMasterIC/IC/DIOD/DIODS11952/DIODS11952-1.pdf?src-supplier=IHS+Markit, ComponentLink1URL=https://datasheet.ciiva.com:443/pdfs/VipMasterIC/IC/DIOD/DIODS11952/DIODS11952-1.pdf?src-supplier=IHS+Markit, ComponentLink2Description=https://datasheet.ciiva.com/26856/getdatasheetpartid-656981-26856375.pdf?src-supplier=Verical, ComponentLink2URL=https://datasheet.ciiva.com/26856/getdatasheetpartid-656981-26856375.pdf?src-supplier=Verical, ComponentLink3Description=https://datasheet.ciiva.com/16415/ap7313-16415567.pdf?src-supplier=Future+Electronics, ComponentLink3URL=https://datasheet.ciiva.com/16415/ap7313-16415567.pdf?src-supplier=Future+Electronics, Height=1mm, Height - Seated (Max)=1.35mm, JESD-30 Code=R-PDSO-G3, JESD-609 Code=e3, Lead Free="Lead Free", Length=3mm, Manufacturer Part Number=AP7313-33SRG-7, Moisture Sensitivity Level=1, Mount="Surface Mount", Number of Functions=1, Number of Outputs=1, Number of Pins=3, Number of Regulators=1, Operating Temperature, TJ-Min=-40°C, Output Current=150mA, Output Current1-Max=150mA, Output Type=Fixed, Output Voltage=3.3V, Output Voltage1-Nom=3.3V, Packaging="Tape and Reel", Polarity=Positive, Pricing 1="1=0.37000, 10=0.29900, 25=0.27360, 100=0.20350, 250=0.18444, 500=0.15264, 1000=0.11448 (USD)", Qualification Status="Not Qualified", Radiation Hardening=No, REACH SVHC="No SVHC", Regulator Type="FIXED POSITIVE SINGLE OUTPUT LDO REGULATOR", RoHS=Yes, RoHS Compliant=Yes, Stock 1=6348, Supplier 1=Digi-Key, Surface Mount=Yes, Terminal Finish=Tin, Terminal Form="Gull Wing", Terminal Pitch=0.96mm, Terminal Position=DUAL, Weight=0.000282oz, Width=1.4mm

## Via types
v1: diameter 25, hole 12, Top Layer to Bottom Layer, 53 vias

## Nets (pads, with @x,y where several pads share a name; then routed paths per layer and width w, separated by ;. In a path a pad name is that pad's centre, name@x,y a point inside that pad or via, vN(x,y) a via of type N, cw(c..) or ccw(c..) an arc to the next point about the centre after c; other vN are vias at no path point)
5V: TP5.1 U1.3 | length 633.9
  Top Layer w10: U1.3 1793.98,1953.98 1820,1980 TP5.1
ALT_VCC: D4.2 TP2.1 | length 721.6
  Top Layer w10: TP2.1 1450,1410 1570,1530 D4.2@1831.87,1530
ALT_VIN: D2.2 TP7.1 | length 2238.9
  Top Layer w10: TP7.1 1750,1340 1810,1400 2420,1400 2490,1470 2490,1750 2440,1800 2090,1800 2030,1860 v1(2030,1930) ; v1(2030,2080) 2030,2150 2070,2190 2158.43,2190 2160,2188.43 D2.2
  Bottom Layer w10: v1(2030,1930) v1(2030,2080)
DEC1: C5.1 J2.1 | length 902.6
  Top Layer w10: C5.1 2720,2520 3030,2210 3030,2087.08 J2.1
DEC2: C6.1 J2.32 | length 1290.2
  Top Layer w10: C6.1 2870,2540 2980,2430 3280,2430 3500,2210 3500,2053.15 ccw(c3529.53,2053.15) J2.32
DEC3: C7.1 J2.33 | length 1211.6
  Top Layer w10: C7.1 2940,2640 3010,2570 3210,2570 3560,2220 3560,2089.27 cw(c3550,2089.32) 3559.98,2088.66 ccw(c3588.59,2086.61) 3559.98,2084.56 cw(c3550,2083.9) 3560,2083.95 3560,2067.96 ccw(c3588.59,2067.96) J2.33
DEC4: C9.2 J2.46 | length 871.3
  Top Layer w10: C9.2 2800,2500 3079.53,2220.47 J2.46
GND: C1.2 C2.2 C3.2 C4.2 C5.2 C6.2 C7.2 C9.1 D8.K J1.3 J1.5 J2.31 J2.45 J2.49 J3.6 J7.4 J7.Shell TP3.1 U1.1
  other v1: 1610,1100 2490,1130 3100,1170 1230,1210 2200,1230 1880,1290 3520,1300 3780,1330 1300,1350 1660,1370 3920,1520 2120,1530 3430,1530 1470,1540 3110,1540 1660,1570 2120,1690 2860,1730 1460,1750 3730,1770 1650,1780 2200,1880 3910,1880 1890,1910 1540,1950 1300,1960 1890,2060 1130,2100 2730,2170 1900,2220 2450,2290 2680,2380 3920,2390 3070,2520 3460,2530 1990,2550 1130,2620 1820,2660 3120,2690 3580,2690 3690,2910 1760,2920 3040,2930 2400,2940
HEADER_VIN: D6.2 J3.2 | length 440.7
  Top Layer w10: J3.2 2160,2401.57 D6.2
NetC1_1: C1.1 C4.1 D1.2 J7.1 | length 536.6
  Top Layer w10: J7.1 C1.1 C4.1 2070,2390 2090,2370 2090,2320 2110,2300 D1.2
NetD1_1: D1.1 D2.1 D5.1 D6.1 F1.2 | length 452.1
  Top Layer w10: D5.1 D2.1@2259.21,2190.79 ; D6.1 2258.43,2398.43 D1.1 2258.43,2191.57 D2.1@2259.21,2190.79 ; F1.2 D2.1 D2.1@2259.21,2190.79
NetD3_1: D3.1 D4.1 TP6.2 | length 471.6
  Top Layer w10: D4.1@1928.43,1530 1928.43,1570 ; D3.1@1928.43,1620 1928.43,1570 ; TP6.2 1928.43,1570
NetD8_A: D8.A R2.2 | length 51.3
  Top Layer w10: D8.A R2.2
NetF1_1: F1.1 TP5.2 | length 212.9
  Top Layer w10: F1.1 2434.17,2188.9 2434.17,1985.83 TP5.2
nRESET: J1.10 J2.24 J3.5 TP1.1 | length 4710.7
  Top Layer w10: v1(1050,1830) J1.10 ; J3.5 2460,2740 2630,2570 2630,1400 2650,1380 v1(2650,1320) ; TP1.1 v1(2650,1320) ; J2.24 3336.62,1396.62 3260,1320 v1(2650,1320)
  Bottom Layer w10: v1(1050,1830) 1120,1830 1460,1490 2510,1490 2650,1350 v1(2650,1320)
SWD_CLK: J1.4 J2.25 J3.4 TP8.1 | length 5257.4
  Top Layer w10: v1(1050,1680) J1.4 ; TP8.1 v1(2350,1320) 2530,1320 2590,1380 2590,2550 2360,2780 J3.4
  Bottom Layer w10: v1(1050,1680) 1210,1680 1430,1460 2250,1460 2350,1360 v1(2350,1320) 2530,1320 2570,1280 3290,1280 3470,1460 3470,1912.91 J2.25
SWD_DIO: J1.2 J2.26 J3.3 TP4.1 | length 5639.3
  Top Layer w10: v1(1050,1630) J1.2 ; TP4.1 v1(2050,1320) 2170,1320 2210,1360 2500,1360 2540,1400 2540,2500 2260,2780 J3.3
  Bottom Layer w10: v1(1050,1630) 1190,1630 1390,1430 1990,1430 2050,1370 v1(2050,1320) 2220,1320 2300,1240 3360,1240 3529.53,1409.53 J2.26
V_JLINK: D5.2 J1.9 | length 958.2
  Top Layer w10: J1.9 1560,1830 1740,2010 2030,2010 2110,2090 D5.2
V_LDO: C2.1 C3.1 D3.2 U1.2 | length 330
  Top Layer w10: D3.2@1830,1620 U1.2 C3.1 C2.1
VCC: J1.1 J2.13 J2.36 J2.48 J3.1 R2.1 TP6.1 | length 4827
  Top Layer w10: J1.1 v1(1440,1630) ; TP6.1 R2.1
  Bottom Layer w10: v1(1440,1630) 2400,1630 2407.5,1622.5 2407.5,1572.5 TP6.1 2760,1570 2969.52,1779.52 3090,1779.52 ; J3.1 2060,2670 2170,2560 2410,2560 2630,2340 3090,2340 ; J2.13 3090,1779.52 ; J2.36 3588.59,2341.41 3540,2390 3180,2390 3163.39,2373.39 J2.48 3161.97,2340 3090,2340 ; 3090,1779.52 3090,2340
pads on no net: J1.6 J1.8 J2.2 J2.3 J2.4 J2.5 J2.6 J2.7 J2.8 J2.9 J2.10 J2.11 J2.12 J2.14 J2.15 J2.16 J2.17 J2.18 J2.19 J2.20 J2.21 J2.22 J2.23 J2.27 J2.28 J2.29 J2.30 J2.34 J2.35 J2.37 J2.38 J2.39 J2.40 J2.41 J2.42 J2.43 J2.44 J2.47 J2.MH1 J2.MH2 J7.2 J7.3 J7.MH1 J7.MH2 M1.11 M2.11 M3.11 M4.11

## Polygon pours and split planes (outlines as drawn)
GND on Top Layer "GND_L01_P000" (solid, remove dead copper, pour order 0): 960,990 960,1010 960,3040 4080,3040 4070,3030 4070,970 960,970
GND on Bottom Layer "GND_L02_P001" (solid, remove dead copper, pour order 1): 970,980 970,3080 4140,3080 4100,3040 4100,940

## Keep-outs
Keep-Out Layer:
  lines w10: 1000,1090 ccw(c1090,1090) 1090,1000 3915.36,1000 ccw(c3915.36,1084.64) 4000,1084.64 4000,2915.36 ccw(c3915.36,2915.36) 3915.36,3000 1084.64,3000 ccw(c1084.64,2915.36) 1000,2915.36 1000,1090

## Silkscreen, mask and mechanical layers (free items; w line width, h text height)
Top Overlay:
  drawing of 16 lines, arcs and shapes, not listed
  text "V1.0" at 1330,2870 h60
  text "VCC" at 2045,2755 h30 r270
  text "VIN" at 2145,2755 h30 r270
  text "SWD DIO" at 2245,2755 h30 r270
  text "SWD CLK" at 2345,2755 h30 r270
  text "nRESET" at 2445,2755 h30 r270
  text "GND" at 2545,2755 h30 r270
  text "USB POWER" at 1190,2030 h60
  text "VIN / ENABLE" at 2300.03,1810 h30
  text "VCC / ENABLE" at 2280.03,1410 h30
  text "J-LINK / ADAPTER" at 1040,1380 h60
  text "nRESET" at 2565,1215 h30
  text "GND" at 2905,1215 h30
  text "ALT / VCC" at 1400,1210 h30
  text "ALT / VIN" at 1700,1210 h30
  text "SWD / DIO" at 2010,1210 h30
  text "SWD / CLK" at 2300,1210 h30
  text "NRF52832 / CHIP SOCKET / PROGRAMMER" at 3065.05,1060 h60
BOARD_OUTLINE:
  the board outline again, w10